# Altium PCB PCB1.PcbDoc (part 1 of 2)
Units mm, origin at the board's own origin, x right, y up, seen from the top; angles counter-clockwise.
Board outline 352.42 x 119.06 mm, 2 copper layers (Top Layer, Bottom Layer); 104 components, 225 nets, 1613 pads, 36 vias.
Unrouted connection lines stored in the file: 300.
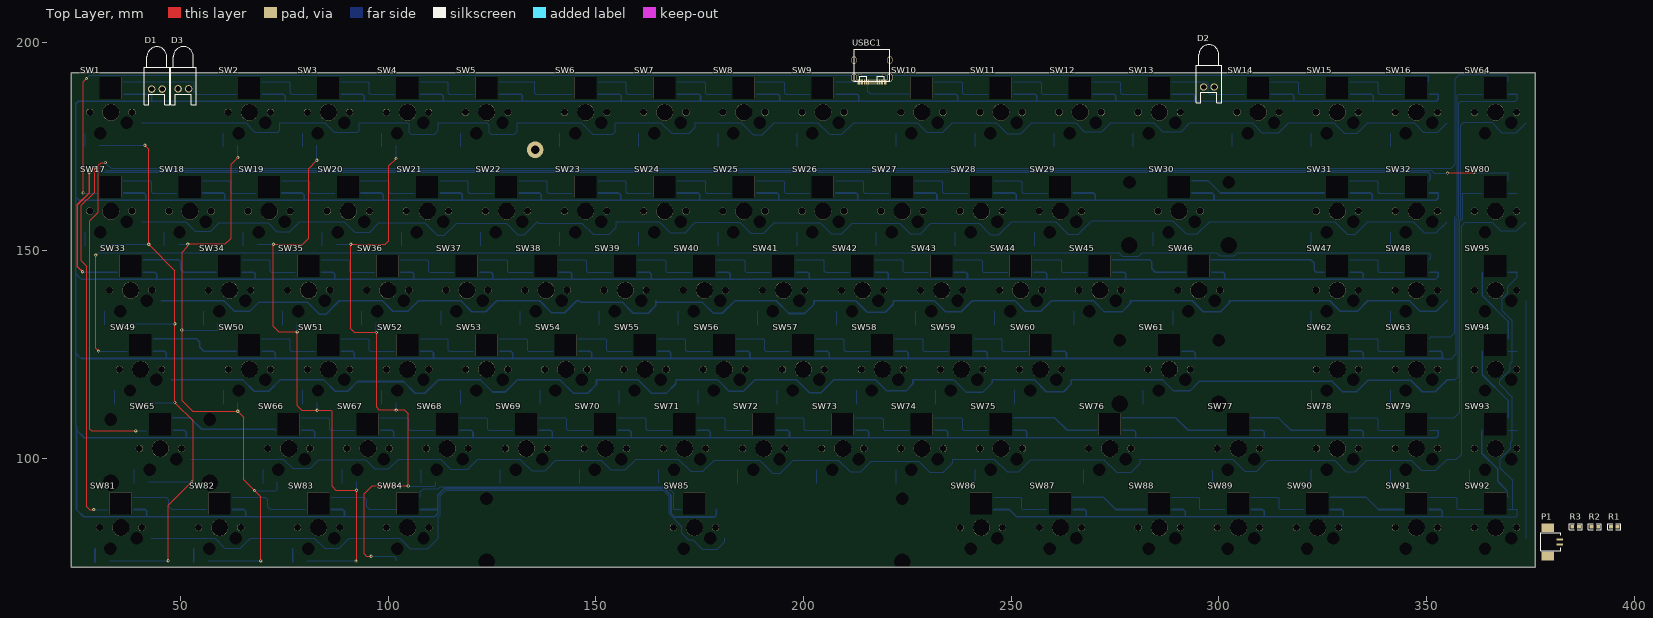
[diagram p0: Top Layer view]
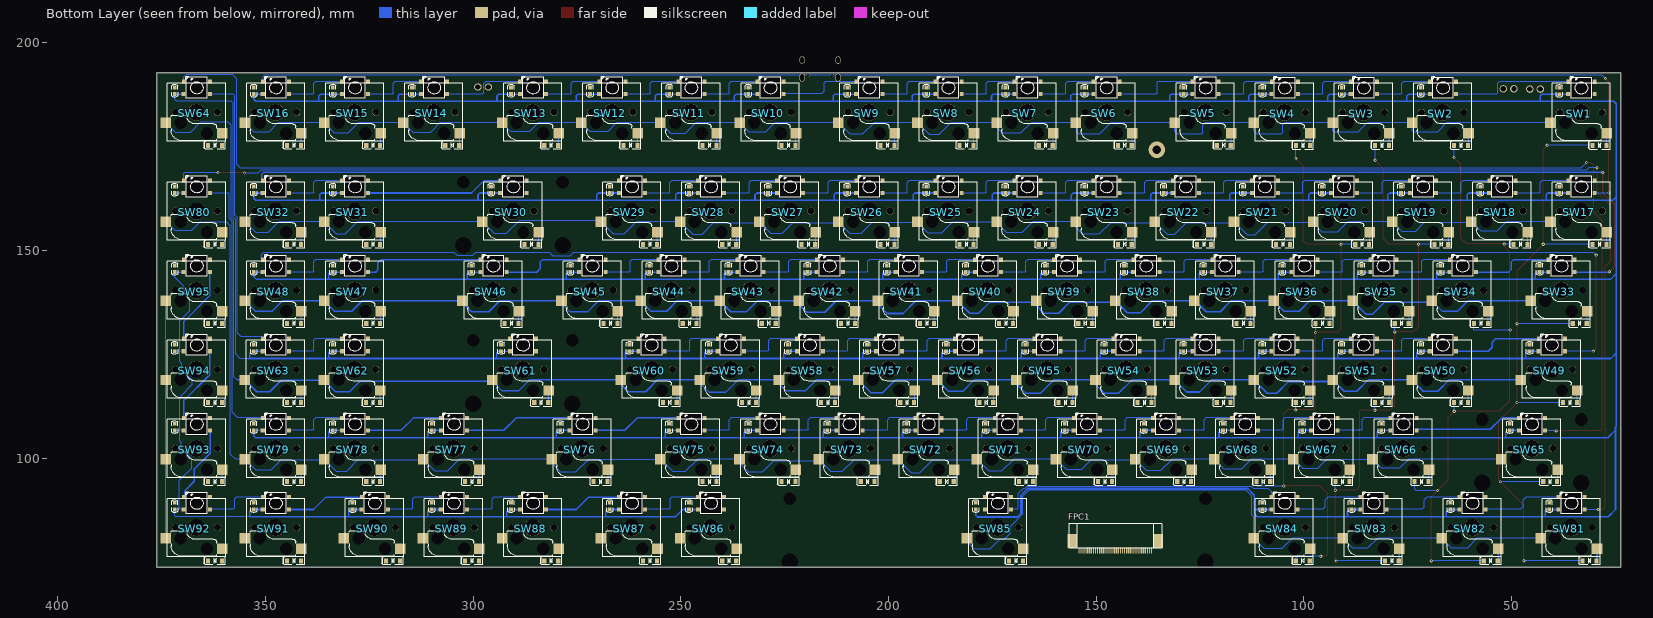
[diagram p1: Bottom Layer view, seen from below]
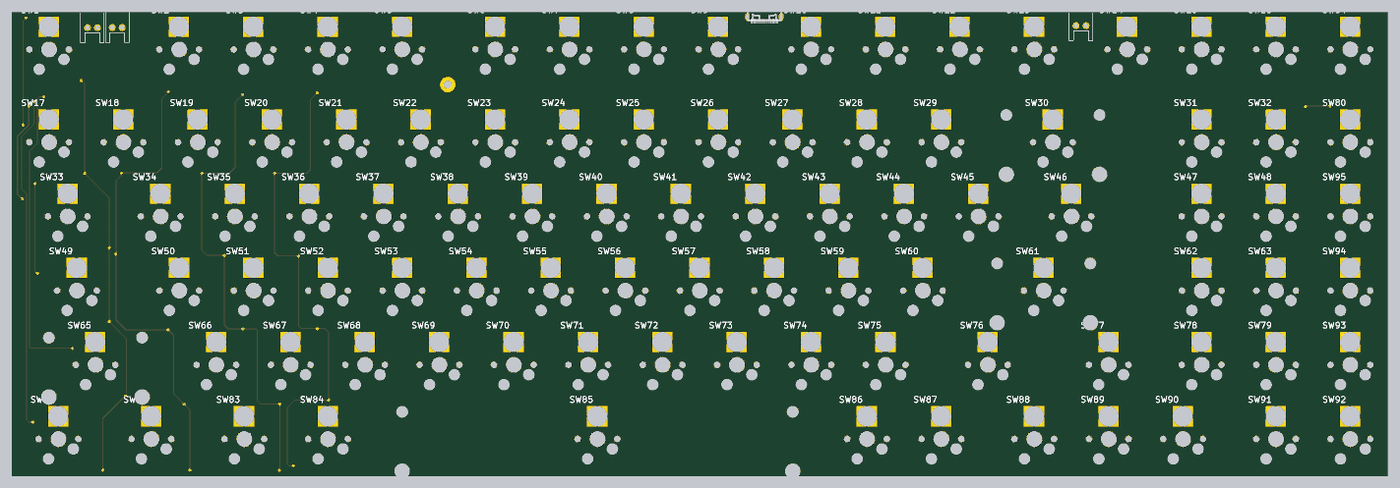
[diagram p3: 3D render of the assembled board from above, using the file's embedded part models]

## Layer stack, top to bottom
Top Solder: solder mask 0.0102, Solder Resist, Dk 3.5
Top Layer: signal copper 0.0356
Dielectric 1: dielectric 0.32, FR-4, Dk 4.8
Bottom Layer: signal copper 0.0356
Bottom Solder: solder mask 0.0102, Solder Resist, Dk 3.5

## Board outline
23.749,73.787 23.749,192.851 376.174,192.851 376.174,73.787

## Design rules (kind name [scope] priority, off if disabled: settings)
Clearance [All] p1: gap=0.152
HoleSize [All] p1 off: absolutevalues=TRUE maxlimit=2.54 minlimit=0.025 maxpercent=80.000 minpercent=20.000
HoleToHoleClearance [All] p1 off: gap=0.254 allowstackedmicrovias=TRUE
LayerPairs [All] p1 off: enforce=TRUE
MinimumSolderMaskSliver [All] p1 off: minsoldermaskwidth=0.254
NetAntennae [All] p1 off: netantennaetolerance=0
PolygonConnect [All] p1: connectstyle=Relief reliefconductorwidth=0.254 reliefentries=4 polygonreliefangle="90 Angle" airgapwidth=0.254
RoutingVias [All] p1: holewidth=0.381 width=0.762 viastyle="Through Hole" minholewidth=0.305 minwidth=0.635 maxholewidth=1.27 maxwidth=2.54
SilkToSilkClearance [All] p1 off: silktosilkclearance=0.254
SilkToSolderMaskClearance [IsPad] p1 off: minsilkscreentomaskgap=0.254 clearancetoexposedcopper=TRUE
SolderMaskExpansion [All] p1: expansion=0.102
Width [All] p1: maxlimit=2.54 minlimit=0.152 preferedwidth=0.254
23 further rules are at their usual default settings.

## Components (designator, comment, footprint, x,y, rotation, side; value= is the part's Value field where it differs from the comment)
D1 "LED0" LED-0 44.348,188.9 r180 top
D2 "LED0" LED-0 297.637,189.408 r180 top
D3 "LED0" LED-0 50.724,188.951 r180 top
FPC1 "AFC07-S36ECC-00" FPC-0.5MM-36P-LCS-SJ-H2.0 145.44,78.943 r180 bottom
P1 "1.25T-2-2A" PH_2PIN_1.25_T_90 382.118,79.248 r90 top
R1 "10k" R0603 395.224,83.541 r0 top
R2 "10k" R0603 390.576,83.541 r0 top
R3 "10k" R0603 385.928,83.541 r0 top
SW1 "MX_SW" MX_SW-7 33.274,183.312 r0 top
SW2 "MX_SW" MX_SW-7 66.599,183.312 r0 top
SW3 "MX_SW" MX_SW-7 85.649,183.312 r0 top
SW4 "MX_SW" MX_SW-7 104.699,183.312 r0 top
SW5 "MX_SW" MX_SW-7 123.749,183.337 r0 top
SW6 "MX_SW" MX_SW-7 147.574,183.337 r0 top
SW7 "MX_SW" MX_SW-7 166.624,183.337 r0 top
SW8 "MX_SW" MX_SW-7 185.674,183.337 r0 top
SW9 "MX_SW" MX_SW-7 204.724,183.337 r0 top
SW10 "MX_SW" MX_SW-7 228.524,183.337 r0 top
SW11 "MX_SW" MX_SW-7 247.574,183.337 r0 top
SW12 "MX_SW" MX_SW-7 266.624,183.337 r0 top
SW13 "MX_SW" MX_SW-7 285.674,183.337 r0 top
SW14 "MX_SW" MX_SW-7 309.499,183.337 r0 top
SW15 "MX_SW" MX_SW-7 328.549,183.337 r0 top
SW16 "MX_SW" MX_SW-7 347.599,183.337 r0 top
SW17 "MX_SW" MX_SW-7 33.274,159.512 r0 top
SW18 "MX_SW" MX_SW-7 52.324,159.512 r0 top
SW19 "MX_SW" MX_SW-7 71.374,159.512 r0 top
SW20 "MX_SW" MX_SW-7 90.424,159.512 r0 top
SW21 "MX_SW" MX_SW-7 109.474,159.512 r0 top
SW22 "MX_SW" MX_SW-7 128.524,159.512 r0 top
SW23 "MX_SW" MX_SW-7 147.574,159.512 r0 top
SW24 "MX_SW" MX_SW-7 166.624,159.512 r0 top
SW25 "MX_SW" MX_SW-7 185.674,159.512 r0 top
SW26 "MX_SW" MX_SW-7 204.724,159.512 r0 top
SW27 "MX_SW" MX_SW-7 223.774,159.512 r0 top
SW28 "MX_SW" MX_SW-7 242.824,159.512 r0 top
SW29 "MX_SW" MX_SW-7 261.874,159.512 r0 top
SW30 "MX_SW" MX_SW-7 290.449,159.512 r0 top
SW31 "MX_SW" MX_SW-7 328.549,159.512 r0 top
SW32 "MX_SW" MX_SW-7 347.599,159.512 r0 top
SW33 "MX_SW" MX_SW-7 38.049,140.462 r0 top
SW34 "MX_SW" MX_SW-7 61.849,140.462 r0 top
SW35 "MX_SW" MX_SW-7 80.899,140.462 r0 top
SW36 "MX_SW" MX_SW-7 99.949,140.462 r0 top
SW37 "MX_SW" MX_SW-7 118.999,140.462 r0 top
SW38 "MX_SW" MX_SW-7 138.049,140.462 r0 top
SW39 "MX_SW" MX_SW-7 157.099,140.462 r0 top
SW40 "MX_SW" MX_SW-7 176.149,140.462 r0 top
SW41 "MX_SW" MX_SW-7 195.199,140.462 r0 top
SW42 "MX_SW" MX_SW-7 214.249,140.462 r0 top
SW43 "MX_SW" MX_SW-7 233.299,140.462 r0 top
SW44 "MX_SW" MX_SW-7 252.349,140.462 r0 top
SW45 "MX_SW" MX_SW-7 271.399,140.462 r0 top
SW46 "MX_SW" MX_SW-7 295.224,140.462 r0 top
SW47 "MX_SW" MX_SW-7 328.549,140.462 r0 top
SW48 "MX_SW" MX_SW-7 347.599,140.462 r0 top
SW49 "MX_SW" MX_SW-7 40.411,121.412 r0 top
SW50 "MX_SW" MX_SW-7 66.624,121.412 r0 top
SW51 "MX_SW" MX_SW-7 85.674,121.412 r0 top
SW52 "MX_SW" MX_SW-7 104.724,121.412 r0 top
SW53 "MX_SW" MX_SW-7 123.774,121.412 r0 top
SW54 "MX_SW" MX_SW-7 142.824,121.412 r0 top
SW55 "MX_SW" MX_SW-7 161.874,121.412 r0 top
SW56 "MX_SW" MX_SW-7 180.924,121.412 r0 top
SW57 "MX_SW" MX_SW-7 199.974,121.412 r0 top
SW58 "MX_SW" MX_SW-7 219.024,121.412 r0 top
SW59 "MX_SW" MX_SW-7 238.074,121.412 r0 top
SW60 "MX_SW" MX_SW-7 257.124,121.412 r0 top
SW61 "MX_SW" MX_SW-7 288.087,121.412 r0 top
SW62 "MX_SW" MX_SW-7 328.574,121.412 r0 top
SW63 "MX_SW" MX_SW-7 347.612,121.412 r0 top
SW64 "MX_SW" MX_SW-7 366.649,183.337 r0 top
SW65 "MX_SW" MX_SW-7 45.161,102.362 r0 top
SW66 "MX_SW" MX_SW-7 76.124,102.362 r0 top
SW67 "MX_SW" MX_SW-7 95.177,102.362 r0 top
SW68 "MX_SW" MX_SW-7 114.229,102.362 r0 top
SW69 "MX_SW" MX_SW-7 133.282,102.362 r0 top
SW70 "MX_SW" MX_SW-7 152.335,102.362 r0 top
SW71 "MX_SW" MX_SW-7 171.388,102.362 r0 top
SW72 "MX_SW" MX_SW-7 190.441,102.362 r0 top
SW73 "MX_SW" MX_SW-7 209.494,102.362 r0 top
SW74 "MX_SW" MX_SW-7 228.546,102.362 r0 top
SW75 "MX_SW" MX_SW-7 247.599,102.362 r0 top
SW76 "MX_SW" MX_SW-7 273.787,102.362 r0 top
SW77 "MX_SW" MX_SW-7 304.724,102.362 r0 top
SW78 "MX_SW" MX_SW-7 328.549,102.362 r0 top
SW79 "MX_SW" MX_SW-7 347.599,102.362 r0 top
SW80 "MX_SW" MX_SW-7 366.649,159.512 r0 top
SW81 "MX_SW" MX_SW-7 35.662,83.312 r0 top
SW82 "MX_SW" MX_SW-7 59.474,83.312 r0 top
SW83 "MX_SW" MX_SW-7 83.287,83.312 r0 top
SW84 "MX_SW" MX_SW-7 104.724,83.312 r0 top
SW85 "MX_SW" MX_SW-7 173.761,83.312 r0 top
SW86 "MX_SW" MX_SW-7 242.824,83.312 r0 top
SW87 "MX_SW" MX_SW-7 261.874,83.312 r0 top
SW88 "MX_SW" MX_SW-7 285.674,83.312 r0 top
SW89 "MX_SW" MX_SW-7 304.749,83.312 r0 top
SW90 "MX_SW" MX_SW-7 323.799,83.312 r0 top
SW91 "MX_SW" MX_SW-7 347.599,83.312 r0 top
SW92 "MX_SW" MX_SW-7 366.649,83.312 r0 top
SW93 "MX_SW" MX_SW-7 366.649,102.362 r0 top
SW94 "MX_SW" MX_SW-7 366.649,121.412 r0 top
SW95 "MX_SW" MX_SW-7 366.649,140.462 r0 top
USBC1 "TYPE-C-31-M-12" TYPE-C-USB-17 216.51,193.243 r180 top

## Footprints (in the part's own frame and the unit in brackets; to place one, negate y for a bottom-side part, rotate by r counter-clockwise, add the part's x,y. Pads: shape width x height; smd on the part's side, far side on the other; paste and mask are expansions set on the pad)
FPC-0.5MM-36P-LCS-SJ-H2.0 [mm]
  rect 0.3x1.5 smd: 1(-8.749,-1.149) 2(-8.25,-1.149) 3(-7.75,-1.149) 4(-7.249,-1.149) 5(-6.749,-1.149) 6(-6.248,-1.149) 7(-5.748,-1.149) 8(-5.249,-1.149) 9(-4.75,-1.149) 10(-4.249,-1.149) 11(-3.749,-1.149) 12(-3.249,-1.149) 13(-2.748,-1.149) 14(-2.249,-1.149) 15(-1.749,-1.149) 16(-1.25,-1.149) 17(-0.749,-1.149) 18(-0.249,-1.149) 19(0.251,-1.149) 20(0.752,-1.149) 21(1.252,-1.149) 22(1.75,-1.149) 23(2.25,-1.149) 24(2.751,-1.149) 25(3.251,-1.149) 26(3.752,-1.149) 27(4.252,-1.149) 28(4.751,-1.149) 29(5.25,-1.149) 30(5.751,-1.149) 31(6.251,-1.149) 32(6.751,-1.149) 33(7.252,-1.151) 34(7.752,-1.151) 35(8.252,-1.151) 36(8.75,-1.149)
  rect 2.2x3.3 smd: 37(10.348,1.151) 38(-10.348,1.151)
  silkscreen extent -11.18,-0.57 11.18,5.35
LED-0 [mil] "LED; 2 Leads"
  round 70 hole 50: 1(50,0) 2(-50,0)
  silkscreen extent -120,-400 120,150
MX_SW-7 [mm] "with Fixation pins  1-Pole w/LED"
  round 0 hole 3 unplated: 0(-2.54,-5.08) 0(3.81,-2.54)
  rect 5.2x5.2 hole 5.2 square unplated: 0(-0.076,5.842)
  rect 2.55x2.5 smd far side: 1(7.366,-2.54) 2(-6.223,-5.08)
  rect 1x1.2 smd far side: 3(-6.125,-7.976) 4(-2.765,-7.976)
  rect 1x1 smd far side: 5(3.073,4.369) 6(3.023,7.366) 7(-3.2,7.366) 8(-3.2,4.369)
  rect 0.9x0.91 smd far side: 5(5.258,4.369) 7(5.258,5.969)
  round 1.702 hole 1.702: ""(-5.08,0) ""(5.08,0)
  round 4.064 hole 4.064: ""(0,0)
  body extent -6.32,-8.78 5.66,5.97, height 1.2
PH_2PIN_1.25_T_90 [mm]
  rect 2.1x3 smd: 0(-2.757,2.921) 0(4.007,2.921)
  rect 0.5x1.5 smd: 1(0,0) 2(1.25,0)
  silkscreen extent -1.49,-0.25 2.83,4.57
R0603 [mm]
  rect 0.9x0.9 smd: 1(-0.8,0) 2(0.8,0)
  silkscreen extent -1.55,-0.75 1.55,0.75, body extent -0.85,-0.4 0.85,0.4, height 0.56
TYPE-C-USB-17 [mm]
  oval 1.2x1.8 hole 0.8 slot 1.4 at 90 deg: 0(-4.32,-2.624) 0(4.32,-2.624)
  oval 1.2x2 hole 0.8 slot 1.6 at 90 deg: 0(-4.32,1.556) 0(4.32,1.556)
  rect 0.3x1.3 smd: A1(-3.35,2.623) A4(-2.55,2.623) A5(-1.25,2.623) A6(-0.25,2.623) A7(0.25,2.623) A8(-1.75,2.624) A9(2.55,2.623) A12(3.35,2.623) B1(3.05,2.623) B4(2.25,2.623) B5(1.75,2.623) B6(0.75,2.623) B7(-0.75,2.623) B8(1.25,2.624) B9(-2.25,2.623) B12(-3.05,2.623)
  round 0.75 hole 0.75 unplated: ""(-2.89,1.026) ""(2.89,1.026)
  silkscreen extent -4.32,-5.23 4.32,2.47

## Part data
D1 D2 D3: "Typical INFRARED GaAs LED"
P1: library part CON2T_90_1, "卧贴座 1.25/2p"
R1 R2 R3: library part Res-0402_10k, "表贴电阻,0402,±1%,1/16W"
SW1 SW2 SW3 SW4 SW5 SW6 SW7 SW8 SW9 SW10 SW11 SW12 SW13 SW14 SW15 SW16 SW17 SW18 SW19 SW20 SW21 SW22 SW23 SW24 SW25 SW26 SW27 SW28 SW29 SW30 SW31 SW32 SW33 SW34 SW35 SW36 SW37 SW38 SW39 SW40 SW41 SW42 SW43 SW44 SW45 SW46 SW47 SW48 SW49 SW50 SW51 SW52 SW53 SW54 SW55 SW56 SW57 SW58 SW59 SW60 SW61 SW62 SW63 SW64 SW65 SW66 SW67 SW68 SW69 SW70 SW71 SW72 SW73 SW74 SW75 SW76 SW77 SW78 SW79 SW80 SW81 SW82 SW83 SW84 SW85 SW86 SW87 SW88 SW89 SW90 SW91 SW92 SW93 SW94 SW95: library part MX_SW-6, "with Fixation pins  1-Pole w/Diode"

## Free pads (board coordinates)
  round 0 hole 3.048: 0(33.223,109.347) 0(223.799,90.297) 0(276.149,128.397) 0(278.511,166.497) 3(57.099,109.347) 3(123.723,90.297) 3(300.025,128.397) 3(302.387,166.497)
  round 4 hole 2: 0(135.407,174.295)
  round 0 hole 3.988: 1(33.223,94.107) 1(223.799,75.057) 1(276.149,113.157) 1(278.511,151.257) 4(57.099,94.107) 4(123.723,75.057) 4(300.025,113.157) 4(302.387,151.257)

## Via types
v1: diameter 0.762, hole 0.381, Top Layer to Bottom Layer, 35 vias
v2: diameter 0.635, hole 0.381, Top Layer to Bottom Layer, 1 vias

## Nets (pads, with @x,y where several pads share a name; then routed paths per layer and width w, separated by ;. In a path a pad name is that pad's centre, name@x,y a point inside that pad or via, vN(x,y) a via of type N, cw(c..) or ccw(c..) an arc to the next point about the centre after c; other vN are vias at no path point)
COL1: FPC1.8 SW1.4 SW17.4 SW33.4 SW49.4 SW65.4 SW81.4 | length 179.1
  Top Layer w0.254: v1(41.453,175.362) 42.367,174.447 v1(42.367,151.536) 48.692,145.212 v1(48.692,113.436) ; v1(47.041,75.336) 47.041,88.671 53.061,94.691 53.061,109.042 v1@48.679,113.424
  Bottom Layer w0.254: SW17.4@30.509,151.536 v1(42.367,151.536) ; SW1.4@30.509,175.336 v1@41.453,175.336 ; SW81.4@32.897,75.336 v1(47.041,75.336) ; SW33.4@35.284,132.486 35.386,132.385 v1(48.692,132.385) ; SW49.4@37.646,113.436 v1(48.692,113.436) ; SW65.4@42.396,94.386 v2(52.756,94.386)
COL2: FPC1.9 SW2.4 SW18.4 SW34.4 SW50.4 SW66.4 SW82.4 | length 159.7
  Top Layer w0.254: v1(63.834,172.419) 62.205,170.79 62.205,152.984 60.858,151.638 51.841,151.638 v1(51.791,151.587) 51.791,151.028 50.394,149.631 50.394,113.919 52.984,111.328 v1(63.805,111.328) 65.227,109.906 65.227,94.844 69.342,90.729 v1(69.342,75.311)
  Bottom Layer w0.254: SW18.4@49.559,151.536 51.74,151.536 v1(51.791,151.587) ; v1(50.339,130.89) 59.084,130.89 SW34.4@59.084,132.486 ; SW82.4@56.734,75.311 v1(69.342,75.311) ; v1(63.805,111.328) SW50.4@63.805,113.382 ; v1(63.834,172.419) SW2.4@63.834,175.336 ; v1(67.869,92.227) 72.974,92.227 73.359,92.612 SW66.4@73.359,94.386
COL3: FPC1.10 SW3.4 SW19.4 SW35.4 SW51.4 SW67.4 SW83.4 | length 148.2
  Top Layer w0.254: v1@72.39,151.46 72.39,131.775 73.711,130.454 v1@78.134,130.454 ; v1(72.39,151.536) 79.477,151.536 80.899,152.959 80.899,169.774 v1(82.884,171.758) ; v1(78.134,130.433) 78.134,112.645 79.172,111.608 86.385,111.608 86.563,111.43 86.563,93.243 87.452,92.354 v1@92.412,92.354 ; v1(92.253,75.26) 92.412,75.419 v1(92.412,92.323)
  Bottom Layer w0.254: SW19.4@68.609,151.536 v1(72.39,151.536) ; v1(78.134,130.433) SW35.4@78.134,132.486 ; SW83.4@80.598,75.26 SW83.4@80.522,75.336 92.177,75.336 v1(92.253,75.26) ; v1(82.884,171.758) SW3.4@82.884,175.336 ; v1(82.909,111.56) SW51.4@82.909,113.436 ; v1(92.412,92.323) SW67.4@92.412,94.386
COL4: FPC1.11 SW4.4 SW20.4 SW36.4 SW52.4 SW68.4 SW84.4 | length 153.4
  Top Layer w0.254: v1(95.91,76.429) 94.793,76.429 94.234,76.987 94.234,91.415 96.164,93.345 v1(104.851,93.345) 104.851,110.693 103.886,111.658 97.815,111.658 97.231,112.243 97.231,130.327 91.897,130.327 91.034,131.191 91.034,151.562 99.365,151.562 100.178,152.375 100.178,170.409 v1(101.934,172.165)
  Bottom Layer w0.254: SW20.4@87.659,151.536 v1(91.059,151.536) ; v1(95.91,76.429) 101.524,76.429 101.959,75.993 SW84.4@101.959,75.336 ; v1(97.184,130.298) SW36.4@97.184,132.486 ; v1(101.934,172.165) SW4.4@101.934,175.336 ; v1(101.959,111.611) SW52.4@101.959,113.436 ; v1@104.851,93.32 111.277,93.32 111.464,93.507 SW68.4@111.464,94.386
COL5: FPC1.12 SW5.4 SW21.4 SW37.4 SW53.4 SW69.4 SW85.4
COL6: FPC1.13 SW6.4 SW22.4 SW38.4 SW54.4 SW70.4 SW86.4
COL7: FPC1.14 SW7.4 SW23.4 SW39.4 SW55.4 SW71.4 SW87.4
COL8: FPC1.15 SW8.4 SW24.4 SW40.4 SW56.4 SW72.4 SW88.4
COL9: FPC1.16 SW9.4 SW25.4 SW41.4 SW57.4 SW73.4 SW89.4
COL10: FPC1.17 SW10.4 SW26.4 SW42.4 SW58.4 SW74.4 SW90.4
COL11: FPC1.18 SW11.4 SW27.4 SW43.4 SW59.4 SW75.4 SW91.4
COL12: FPC1.19 SW12.4 SW28.4 SW44.4 SW60.4 SW76.4 SW92.4
COL13: FPC1.20 SW13.4 SW29.4 SW45.4 SW61.4 SW77.4 SW93.4
COL14: FPC1.21 SW14.4 SW30.4 SW46.4 SW62.4 SW78.4 SW94.4
COL15: FPC1.22 SW15.4 SW31.4 SW47.4 SW63.4 SW79.4 SW95.4
COL16: FPC1.23 SW16.4 SW32.4 SW48.4 SW64.4 SW80.4
GND: FPC1.36 P1.1 SW1.7 SW2.7 SW3.7 SW4.7 SW5.7 SW6.7 SW7.7 SW8.7 SW9.7 SW10.7 SW11.7 SW12.7 SW13.7 SW14.7 SW15.7 SW16.7 SW17.7 SW18.7 SW19.7 SW25.7 SW26.7 SW27.7 SW28.7 SW29.7 SW30.7 SW31.7 SW32.7 SW33.7 SW34.7 SW35.7 SW36.7 SW37.7 SW38.7 SW39.7 SW40.7 SW41.7 SW42.7 SW43.7 SW44.7 SW45.7 SW46.7 SW47.7 SW48.7 SW49.7 SW50.7 SW51.7 SW52.7 SW53.7 SW54.7 SW55.7 SW56.7 SW57.7 SW58.7 SW59.7 SW60.7 SW61.7 SW62.7 SW63.7 SW64.7 SW65.7 SW66.7 SW67.7 SW68.7 SW69.7 SW70.7 SW71.7 SW72.7 SW73.7 SW74.7 SW75.7 SW76.7 SW77.7 SW78.7 SW79.7 SW80.7 SW81.7 SW82.7 SW83.7 SW84.7 SW85.7 SW86.7 SW87.7 SW88.7 SW89.7 SW90.7 SW91.7 SW92.7 SW93.7 SW94.7 SW95.7
LED1: D1.2 FPC1.24
LED2: D2.2 FPC1.25
LED3: D3.2 FPC1.26
NetD1_1: D1.1 R1.2
NetD2_1: D2.1 R2.2
NetD3_1: D3.1 R3.2
NetSW1_2: SW1.2 SW1.3 | length 3.3
  Bottom Layer w0.254: SW1.3@27.051,174.977 SW1.2@27.051,178.232
NetSW1_6: SW1.6 SW2.8 | length 29.7
  Bottom Layer w0.254: SW1.6@36.297,190.678 52.984,190.678 53.289,190.373 53.289,188.087 53.696,187.681 SW2.8@63.398,187.681
NetSW2_2: SW2.2 SW2.3 | length 3.3
  Bottom Layer w0.254: SW2.3@60.376,174.977 SW2.2@60.376,178.232
NetSW2_6: SW2.6 SW3.8 | length 15.5
  Bottom Layer w0.254: SW2.6@69.621,190.678 76.048,190.678 76.429,190.297 76.429,187.909 76.657,187.681 SW3.8@82.448,187.681
NetSW3_2: SW3.2 SW3.3 | length 3.3
  Bottom Layer w0.254: SW3.3@79.426,174.977 SW3.2@79.426,178.232
NetSW3_6: SW3.6 SW4.8 | length 15.5
  Bottom Layer w0.254: SW3.6@88.671,190.678 95.098,190.678 95.479,190.297 95.479,187.909 95.707,187.681 SW4.8@101.498,187.681
NetSW4_2: SW4.2 SW4.3 | length 3.3
  Bottom Layer w0.254: SW4.3@98.476,174.977 SW4.2@98.476,178.232
NetSW4_6: SW4.6 SW5.8 | length 15.5
  Bottom Layer w0.254: SW4.6@107.721,190.678 114.148,190.678 114.529,190.297 114.529,187.909 114.757,187.681 SW5.8@120.548,187.681
NetSW5_2: SW5.2 SW5.3 | length 3.3
  Bottom Layer w0.254: SW5.3@117.526,175.002 SW5.2@117.526,178.257
NetSW5_6: SW5.6 SW6.8 | length 20.4
  Bottom Layer w0.254: SW5.6@126.771,190.703 135.204,190.703 135.357,190.551 135.357,187.935 135.585,187.706 SW6.8@144.374,187.706
NetSW6_2: SW6.2 SW6.3 | length 3.3
  Bottom Layer w0.254: SW6.3@141.351,175.002 SW6.2@141.351,178.257
NetSW6_6: SW6.6 SW7.8 | length 15.5
  Bottom Layer w0.254: SW6.6@150.597,190.703 157.023,190.703 157.404,190.322 157.404,187.935 157.632,187.706 SW7.8@163.424,187.706
NetSW7_2: SW7.2 SW7.3 | length 3.3
  Bottom Layer w0.254: SW7.3@160.401,175.002 SW7.2@160.401,178.257
NetSW7_6: SW7.6 SW8.8 | length 15.5
  Bottom Layer w0.254: SW7.6@169.647,190.703 176.073,190.703 176.454,190.322 176.454,187.935 176.682,187.706 SW8.8@182.474,187.706
NetSW8_2: SW8.2 SW8.3 | length 3.3
  Bottom Layer w0.254: SW8.3@179.451,175.002 SW8.2@179.451,178.257
NetSW8_6: SW8.6 SW9.8 | length 15.5
  Bottom Layer w0.254: SW8.6@188.697,190.703 195.123,190.703 195.504,190.322 195.504,187.935 195.732,187.706 SW9.8@201.524,187.706
NetSW9_2: SW9.2 SW9.3 | length 3.3
  Bottom Layer w0.254: SW9.3@198.501,175.002 SW9.2@198.501,178.257
NetSW9_6: SW9.6 SW10.8 | length 20
  Bottom Layer w0.254: SW9.6@207.747,190.703 215.24,190.703 215.544,190.398 215.544,188.417 216.154,187.808 225.222,187.808 SW10.8@225.323,187.706
NetSW10_2: SW10.2 SW10.3 | length 3.3
  Bottom Layer w0.254: SW10.3@222.301,175.002 SW10.2@222.301,178.257
NetSW10_6: SW10.6 SW11.8 | length 15.5
  Bottom Layer w0.254: SW10.6@231.546,190.703 237.973,190.703 238.354,190.322 238.354,187.935 238.582,187.706 SW11.8@244.373,187.706
NetSW11_2: SW11.2 SW11.3 | length 3.3
  Bottom Layer w0.254: SW11.3@241.351,175.002 SW11.2@241.351,178.257
NetSW11_6: SW11.6 SW12.8 | length 15.5
  Bottom Layer w0.254: SW11.6@250.596,190.703 257.023,190.703 257.404,190.322 257.404,187.935 257.632,187.706 SW12.8@263.423,187.706
NetSW12_2: SW12.2 SW12.3 | length 3.3
  Bottom Layer w0.254: SW12.3@260.401,175.002 SW12.2@260.401,178.257
NetSW12_6: SW12.6 SW13.8 | length 15.5
  Bottom Layer w0.254: SW12.6@269.646,190.703 276.073,190.703 276.454,190.322 276.454,187.935 276.682,187.706 SW13.8@282.473,187.706
NetSW13_2: SW13.2 SW13.3 | length 3.3
  Bottom Layer w0.254: SW13.3@279.451,175.002 SW13.2@279.451,178.257
NetSW13_6: SW13.6 SW14.8 | length 20.1
  Bottom Layer w0.254: SW13.6@288.696,190.703 296.977,190.703 297.459,190.221 297.459,188.062 297.815,187.706 SW14.8@306.299,187.706
NetSW14_2: SW14.2 SW14.3 | length 3.3
  Bottom Layer w0.254: SW14.3@303.276,175.002 SW14.2@303.276,178.257
NetSW14_6: SW14.6 SW15.8 | length 15.5
  Bottom Layer w0.254: SW14.6@312.522,190.703 318.948,190.703 319.329,190.322 319.329,187.935 319.557,187.706 SW15.8@325.349,187.706
NetSW15_2: SW15.2 SW15.3 | length 3.3
  Bottom Layer w0.254: SW15.3@322.326,175.002 SW15.2@322.326,178.257
NetSW15_6: SW15.6 SW16.8 | length 15.5
  Bottom Layer w0.254: SW15.6@331.572,190.703 337.998,190.703 338.379,190.322 338.379,187.935 338.607,187.706 SW16.8@344.399,187.706
NetSW16_2: SW16.2 SW16.3 | length 3.3
  Bottom Layer w0.254: SW16.3@341.376,175.002 SW16.2@341.376,178.257
NetSW16_6: SW16.6 SW17.8 | length 356.3
  Top Layer w0.254: v1(26.594,163.881) 26.594,190.627 v1(27.381,191.414)
  Bottom Layer w0.254: v1(26.594,163.881) SW17.8@30.074,163.881 ; v1(27.381,191.414) 28.219,192.253 350.393,192.253 350.622,192.024 SW16.6@350.622,190.703
NetSW17_2: SW17.2 SW17.3 | length 3.3
  Bottom Layer w0.254: SW17.3@27.051,151.177 SW17.2@27.051,154.432
NetSW17_6: SW17.6 SW18.8 | length 15.5
  Bottom Layer w0.254: SW17.6@36.297,166.878 42.723,166.878 43.104,166.497 43.104,164.109 43.332,163.881 SW18.8@49.124,163.881
NetSW18_2: SW18.2 SW18.3 | length 3.3
  Bottom Layer w0.254: SW18.3@46.101,151.177 SW18.2@46.101,154.432
NetSW18_6: SW18.6 SW19.8 | length 15.5
  Bottom Layer w0.254: SW18.6@55.347,166.878 61.773,166.878 62.154,166.497 62.154,164.109 62.382,163.881 SW19.8@68.174,163.881
NetSW19_2: SW19.2 SW19.3 | length 3.3
  Bottom Layer w0.254: SW19.3@65.151,151.177 SW19.2@65.151,154.432
NetSW19_6: SW19.6 SW20.8 | length 15.5
  Bottom Layer w0.254: SW19.6@74.397,166.878 80.823,166.878 81.204,166.497 81.204,164.109 81.432,163.881 SW20.8@87.224,163.881
NetSW20_2: SW20.2 SW20.3 | length 3.3
  Bottom Layer w0.254: SW20.3@84.201,151.177 SW20.2@84.201,154.432
NetSW20_6: SW20.6 SW21.8 | length 15.5
  Bottom Layer w0.254: SW20.6@93.447,166.878 99.873,166.878 100.254,166.497 100.254,164.109 100.482,163.881 SW21.8@106.274,163.881
NetSW21_2: SW21.2 SW21.3 | length 3.3
  Bottom Layer w0.254: SW21.3@103.251,151.177 SW21.2@103.251,154.432
NetSW21_6: SW21.6 SW22.8 | length 15.5
  Bottom Layer w0.254: SW21.6@112.497,166.878 118.923,166.878 119.304,166.497 119.304,164.109 119.532,163.881 SW22.8@125.324,163.881
NetSW22_2: SW22.2 SW22.3 | length 3.3
  Bottom Layer w0.254: SW22.3@122.301,151.177 SW22.2@122.301,154.432
NetSW22_6: SW22.6 SW23.8 | length 15.5
  Bottom Layer w0.254: SW22.6@131.547,166.878 137.973,166.878 138.354,166.497 138.354,164.109 138.582,163.881 SW23.8@144.374,163.881
NetSW23_2: SW23.2 SW23.3 | length 3.3
  Bottom Layer w0.254: SW23.3@141.351,151.177 SW23.2@141.351,154.432
NetSW23_6: SW23.6 SW24.8 | length 15.5
  Bottom Layer w0.254: SW23.6@150.597,166.878 157.023,166.878 157.404,166.497 157.404,164.109 157.632,163.881 SW24.8@163.424,163.881
NetSW24_2: SW24.2 SW24.3 | length 3.3
  Bottom Layer w0.254: SW24.3@160.401,151.177 SW24.2@160.401,154.432
NetSW24_6: SW24.6 SW25.8 | length 15.5
  Bottom Layer w0.254: SW24.6@169.647,166.878 176.073,166.878 176.454,166.497 176.454,164.109 176.682,163.881 SW25.8@182.474,163.881
NetSW25_2: SW25.2 SW25.3 | length 3.3
  Bottom Layer w0.254: SW25.3@179.451,151.177 SW25.2@179.451,154.432
NetSW25_6: SW25.6 SW26.8 | length 15.5
  Bottom Layer w0.254: SW25.6@188.697,166.878 195.123,166.878 195.504,166.497 195.504,164.109 195.732,163.881 SW26.8@201.524,163.881
NetSW26_2: SW26.2 SW26.3 | length 3.3
  Bottom Layer w0.254: SW26.3@198.501,151.177 SW26.2@198.501,154.432
NetSW26_6: SW26.6 SW27.8 | length 15.5
  Bottom Layer w0.254: SW26.6@207.747,166.878 214.173,166.878 214.554,166.497 214.554,164.109 214.782,163.881 SW27.8@220.574,163.881
NetSW27_2: SW27.2 SW27.3 | length 3.3
  Bottom Layer w0.254: SW27.3@217.551,151.177 SW27.2@217.551,154.432
NetSW27_6: SW27.6 SW28.8 | length 15.5
  Bottom Layer w0.254: SW27.6@226.797,166.878 233.223,166.878 233.604,166.497 233.604,164.109 233.832,163.881 SW28.8@239.624,163.881
NetSW28_2: SW28.2 SW28.3 | length 3.3
  Bottom Layer w0.254: SW28.3@236.601,151.177 SW28.2@236.601,154.432
NetSW28_6: SW28.6 SW29.8 | length 15.5
  Bottom Layer w0.254: SW28.6@245.847,166.878 252.273,166.878 252.654,166.497 252.654,164.109 252.882,163.881 SW29.8@258.674,163.881
NetSW29_2: SW29.2 SW29.3 | length 3.3
  Bottom Layer w0.254: SW29.3@255.651,151.177 SW29.2@255.651,154.432
NetSW29_6: SW29.6 SW30.8
NetSW30_2: SW30.2 SW30.3 | length 3.3
  Bottom Layer w0.254: SW30.3@284.226,151.177 SW30.2@284.226,154.432
NetSW30_6: SW30.6 SW31.8 | length 33.1
  Bottom Layer w0.381: SW30.6@293.472,166.878 297.434,166.878 300.431,163.881 SW31.8@325.349,163.881
NetSW31_2: SW31.2 SW31.3 | length 3.3
  Bottom Layer w0.254: SW31.3@322.326,151.177 SW31.2@322.326,154.432
NetSW31_6: SW31.6 SW32.8 | length 15.5
  Bottom Layer w0.254: SW31.6@331.572,166.878 337.998,166.878 338.379,166.497 338.379,164.109 338.607,163.881 SW32.8@344.399,163.881
NetSW32_2: SW32.2 SW32.3 | length 3.3
  Bottom Layer w0.254: SW32.3@341.376,151.177 SW32.2@341.376,154.432
NetSW32_6: SW32.6 SW33.8 | length 358.8
  Top Layer w0.381: v1(26.467,144.932) 25.197,146.202 25.197,161.036 28.067,163.906 v1(28.067,168.834)
  Bottom Layer w0.381: v1(26.467,144.932) 26.568,144.831 SW33.8@34.849,144.831 ; v1(28.067,168.834) 350.596,168.834 350.977,168.453 350.977,167.234 SW32.6@350.622,166.878
NetSW33_2: SW33.2 SW33.3 | length 3.3
  Bottom Layer w0.254: SW33.3@31.826,132.127 SW33.2@31.826,135.382
NetSW33_6: SW33.6 SW34.8 | length 19.9
  Bottom Layer w0.381: SW33.6@41.072,147.828 49.555,147.828 50.14,147.244 50.14,145.44 50.749,144.831 SW34.8@58.649,144.831
NetSW34_2: SW34.2 SW34.3 | length 3.3
  Bottom Layer w0.254: SW34.3@55.626,132.127 SW34.2@55.626,135.382
NetSW34_6: SW34.6 SW35.8 | length 15.5
  Bottom Layer w0.254: SW34.6@64.872,147.828 71.298,147.828 71.679,147.447 71.679,145.059 71.907,144.831 SW35.8@77.699,144.831
NetSW35_2: SW35.2 SW35.3 | length 3.3
  Bottom Layer w0.254: SW35.3@74.676,132.127 SW35.2@74.676,135.382
NetSW35_6: SW35.6 SW36.8 | length 15.5
  Bottom Layer w0.254: SW35.6@83.922,147.828 90.348,147.828 90.729,147.447 90.729,145.059 90.957,144.831 SW36.8@96.749,144.831
NetSW36_2: SW36.2 SW36.3 | length 3.3
  Bottom Layer w0.254: SW36.3@93.726,132.127 SW36.2@93.726,135.382
NetSW36_6: SW36.6 SW37.8 | length 15.5
  Bottom Layer w0.254: SW36.6@102.972,147.828 109.398,147.828 109.779,147.447 109.779,145.059 110.007,144.831 SW37.8@115.799,144.831
NetSW37_2: SW37.2 SW37.3 | length 3.3
  Bottom Layer w0.254: SW37.3@112.776,132.127 SW37.2@112.776,135.382
NetSW37_6: SW37.6 SW38.8 | length 15.5
  Bottom Layer w0.254: SW37.6@122.022,147.828 128.448,147.828 128.829,147.447 128.829,145.059 129.057,144.831 SW38.8@134.849,144.831
NetSW38_2: SW38.2 SW38.3 | length 3.3
  Bottom Layer w0.254: SW38.3@131.826,132.127 SW38.2@131.826,135.382
NetSW38_6: SW38.6 SW39.8 | length 15.5
  Bottom Layer w0.254: SW38.6@141.072,147.828 147.498,147.828 147.879,147.447 147.879,145.059 148.107,144.831 SW39.8@153.899,144.831
NetSW39_2: SW39.2 SW39.3 | length 3.3
  Bottom Layer w0.254: SW39.3@150.876,132.127 SW39.2@150.876,135.382
NetSW39_6: SW39.6 SW40.8 | length 15.5
  Bottom Layer w0.254: SW39.6@160.122,147.828 166.548,147.828 166.929,147.447 166.929,145.059 167.157,144.831 SW40.8@172.949,144.831
NetSW40_2: SW40.2 SW40.3 | length 3.3
  Bottom Layer w0.254: SW40.3@169.926,132.127 SW40.2@169.926,135.382
NetSW40_6: SW40.6 SW41.8 | length 15.5
  Bottom Layer w0.254: SW40.6@179.172,147.828 185.598,147.828 185.979,147.447 185.979,145.059 186.207,144.831 SW41.8@191.999,144.831
NetSW41_2: SW41.2 SW41.3 | length 3.3
  Bottom Layer w0.254: SW41.3@188.976,132.127 SW41.2@188.976,135.382
NetSW41_6: SW41.6 SW42.8 | length 15.5
  Bottom Layer w0.254: SW41.6@198.222,147.828 204.648,147.828 205.029,147.447 205.029,145.059 205.257,144.831 SW42.8@211.049,144.831
NetSW42_2: SW42.2 SW42.3 | length 3.3
  Bottom Layer w0.254: SW42.3@208.026,132.127 SW42.2@208.026,135.382
NetSW42_6: SW42.6 SW43.8 | length 15.5
  Bottom Layer w0.254: SW42.6@217.272,147.828 223.698,147.828 224.079,147.447 224.079,145.059 224.307,144.831 SW43.8@230.099,144.831
NetSW43_2: SW43.2 SW43.3 | length 3.3
  Bottom Layer w0.254: SW43.3@227.076,132.127 SW43.2@227.076,135.382
NetSW43_6: SW43.6 SW44.8 | length 15.5
  Bottom Layer w0.254: SW43.6@236.322,147.828 242.748,147.828 243.129,147.447 243.129,145.059 243.357,144.831 SW44.8@249.149,144.831
NetSW44_2: SW44.2 SW44.3 | length 3.3
  Bottom Layer w0.254: SW44.3@246.126,132.127 SW44.2@246.126,135.382
NetSW44_6: SW44.6 SW45.8 | length 15.5
  Bottom Layer w0.254: SW44.6@255.372,147.828 261.798,147.828 262.179,147.447 262.179,145.059 262.407,144.831 SW45.8@268.199,144.831
NetSW45_2: SW45.2 SW45.3 | length 3.3
  Bottom Layer w0.254: SW45.3@265.176,132.127 SW45.2@265.176,135.382
NetSW45_6: SW45.6 SW46.8 | length 19.8
  Bottom Layer w0.381: SW45.6@274.422,147.828 283.337,147.828 283.921,147.244 283.921,145.618 284.709,144.831 SW46.8@292.024,144.831
NetSW46_2: SW46.2 SW46.3 | length 3.3
  Bottom Layer w0.254: SW46.3@289.001,132.127 SW46.2@289.001,135.382
NetSW46_6: SW46.6 SW47.8 | length 29.3
  Bottom Layer w0.381: SW46.6@298.247,147.828 322.174,147.828 323.037,146.964 323.037,145.263 323.469,144.831 SW47.8@325.349,144.831
NetSW47_2: SW47.2 SW47.3 | length 3.3
  Bottom Layer w0.254: SW47.3@322.326,132.127 SW47.2@322.326,135.382
NetSW47_6: SW47.6 SW48.8 | length 15.5
  Bottom Layer w0.254: SW47.6@331.572,147.828 337.998,147.828 338.379,147.447 338.379,145.059 338.607,144.831 SW48.8@344.399,144.831
NetSW48_2: SW48.2 SW48.3 | length 3.3
  Bottom Layer w0.254: SW48.3@341.376,132.127 SW48.2@341.376,135.382
NetSW48_6: SW48.6 SW49.8 | length 354.8
  Top Layer w0.254: v1(29.642,148.92) 29.642,126.492 v1(30.302,125.832)
  Bottom Layer w0.254: v1(29.642,148.92) 30.201,149.479 275.895,149.479 276.758,148.615 280.695,148.615 281.534,149.454 299.491,149.454 300.228,148.717 303.784,148.717 304.571,149.504 350.545,149.504 351.053,148.996 351.053,148.26 SW48.6@350.622,147.828 ; v1(30.302,125.832) 37.16,125.832 SW49.8@37.211,125.781
NetSW49_2: SW49.2 SW49.3 | length 3.3
  Bottom Layer w0.254: SW49.3@34.188,113.077 SW49.2@34.188,116.332
NetSW49_6: SW49.6 SW50.8 | length 22
  Bottom Layer w0.381: SW49.6@43.434,128.778 53.873,128.778 54.686,127.965 54.686,126.721 55.626,125.781 SW50.8@63.424,125.781
NetSW50_2: SW50.2 SW50.3 | length 3.3
  Bottom Layer w0.254: SW50.3@60.401,113.077 SW50.2@60.401,116.332
NetSW50_6: SW50.6 SW51.8 | length 15.5
  Bottom Layer w0.254: SW50.6@69.647,128.778 76.073,128.778 76.454,128.397 76.454,126.009 76.683,125.781 SW51.8@82.474,125.781
NetSW51_2: SW51.2 SW51.3 | length 3.3
  Bottom Layer w0.254: SW51.3@79.451,113.077 SW51.2@79.451,116.332
NetSW51_6: SW51.6 SW52.8 | length 15.5
  Bottom Layer w0.254: SW51.6@88.697,128.778 95.123,128.778 95.504,128.397 95.504,126.009 95.733,125.781 SW52.8@101.524,125.781
NetSW52_2: SW52.2 SW52.3 | length 3.3
  Bottom Layer w0.254: SW52.3@98.501,113.077 SW52.2@98.501,116.332
NetSW52_6: SW52.6 SW53.8 | length 15.5
  Bottom Layer w0.254: SW52.6@107.747,128.778 114.173,128.778 114.554,128.397 114.554,126.009 114.783,125.781 SW53.8@120.574,125.781
NetSW53_2: SW53.2 SW53.3 | length 3.3
  Bottom Layer w0.254: SW53.3@117.551,113.077 SW53.2@117.551,116.332
NetSW53_6: SW53.6 SW54.8 | length 15.5
  Bottom Layer w0.254: SW53.6@126.797,128.778 133.223,128.778 133.604,128.397 133.604,126.009 133.833,125.781 SW54.8@139.624,125.781
NetSW54_2: SW54.2 SW54.3 | length 3.3
  Bottom Layer w0.254: SW54.3@136.601,113.077 SW54.2@136.601,116.332
NetSW54_6: SW54.6 SW55.8 | length 15.5
  Bottom Layer w0.254: SW54.6@145.847,128.778 152.273,128.778 152.654,128.397 152.654,126.009 152.883,125.781 SW55.8@158.674,125.781
NetSW55_2: SW55.2 SW55.3 | length 3.3
  Bottom Layer w0.254: SW55.3@155.651,113.077 SW55.2@155.651,116.332
NetSW55_6: SW55.6 SW56.8 | length 15.5
  Bottom Layer w0.254: SW55.6@164.897,128.778 171.323,128.778 171.704,128.397 171.704,126.009 171.933,125.781 SW56.8@177.724,125.781
NetSW56_2: SW56.2 SW56.3 | length 3.3
  Bottom Layer w0.254: SW56.3@174.701,113.077 SW56.2@174.701,116.332
NetSW56_6: SW56.6 SW57.8 | length 15.5
  Bottom Layer w0.254: SW56.6@183.947,128.778 190.373,128.778 190.754,128.397 190.754,126.009 190.983,125.781 SW57.8@196.774,125.781
NetSW57_2: SW57.2 SW57.3 | length 3.3
  Bottom Layer w0.254: SW57.3@193.751,113.077 SW57.2@193.751,116.332
NetSW57_6: SW57.6 SW58.8 | length 15.5
  Bottom Layer w0.254: SW57.6@202.997,128.778 209.423,128.778 209.804,128.397 209.804,126.009 210.033,125.781 SW58.8@215.824,125.781
NetSW58_2: SW58.2 SW58.3 | length 3.3
  Bottom Layer w0.254: SW58.3@212.801,113.077 SW58.2@212.801,116.332
NetSW58_6: SW58.6 SW59.8 | length 15.5
  Bottom Layer w0.254: SW58.6@222.047,128.778 228.473,128.778 228.854,128.397 228.854,126.009 229.083,125.781 SW59.8@234.874,125.781
NetSW59_2: SW59.2 SW59.3 | length 3.3
  Bottom Layer w0.254: SW59.3@231.851,113.077 SW59.2@231.851,116.332
NetSW59_6: SW59.6 SW60.8 | length 15.5
  Bottom Layer w0.254: SW59.6@241.097,128.778 247.523,128.778 247.904,128.397 247.904,126.009 248.133,125.781 SW60.8@253.924,125.781
NetSW60_2: SW60.2 SW60.3 | length 3.3
  Bottom Layer w0.254: SW60.3@250.901,113.077 SW60.2@250.901,116.332
NetSW60_6: SW60.6 SW61.8
NetSW61_2: SW61.2 SW61.3 | length 3.3
  Bottom Layer w0.254: SW61.3@281.864,113.077 SW61.2@281.864,116.332
NetSW61_6: SW61.6 SW62.8